# Altium PCB Sensor_Box_CAN_Switch.PCBDOC
Units mm, origin at the board's own origin, x right, y up, seen from the top; angles counter-clockwise.
Board outline 38 x 35.75 mm, 2 copper layers (Top, Bot), stack 1.571 mm thick; 63 components, 52 nets, 225 pads, 76 vias.
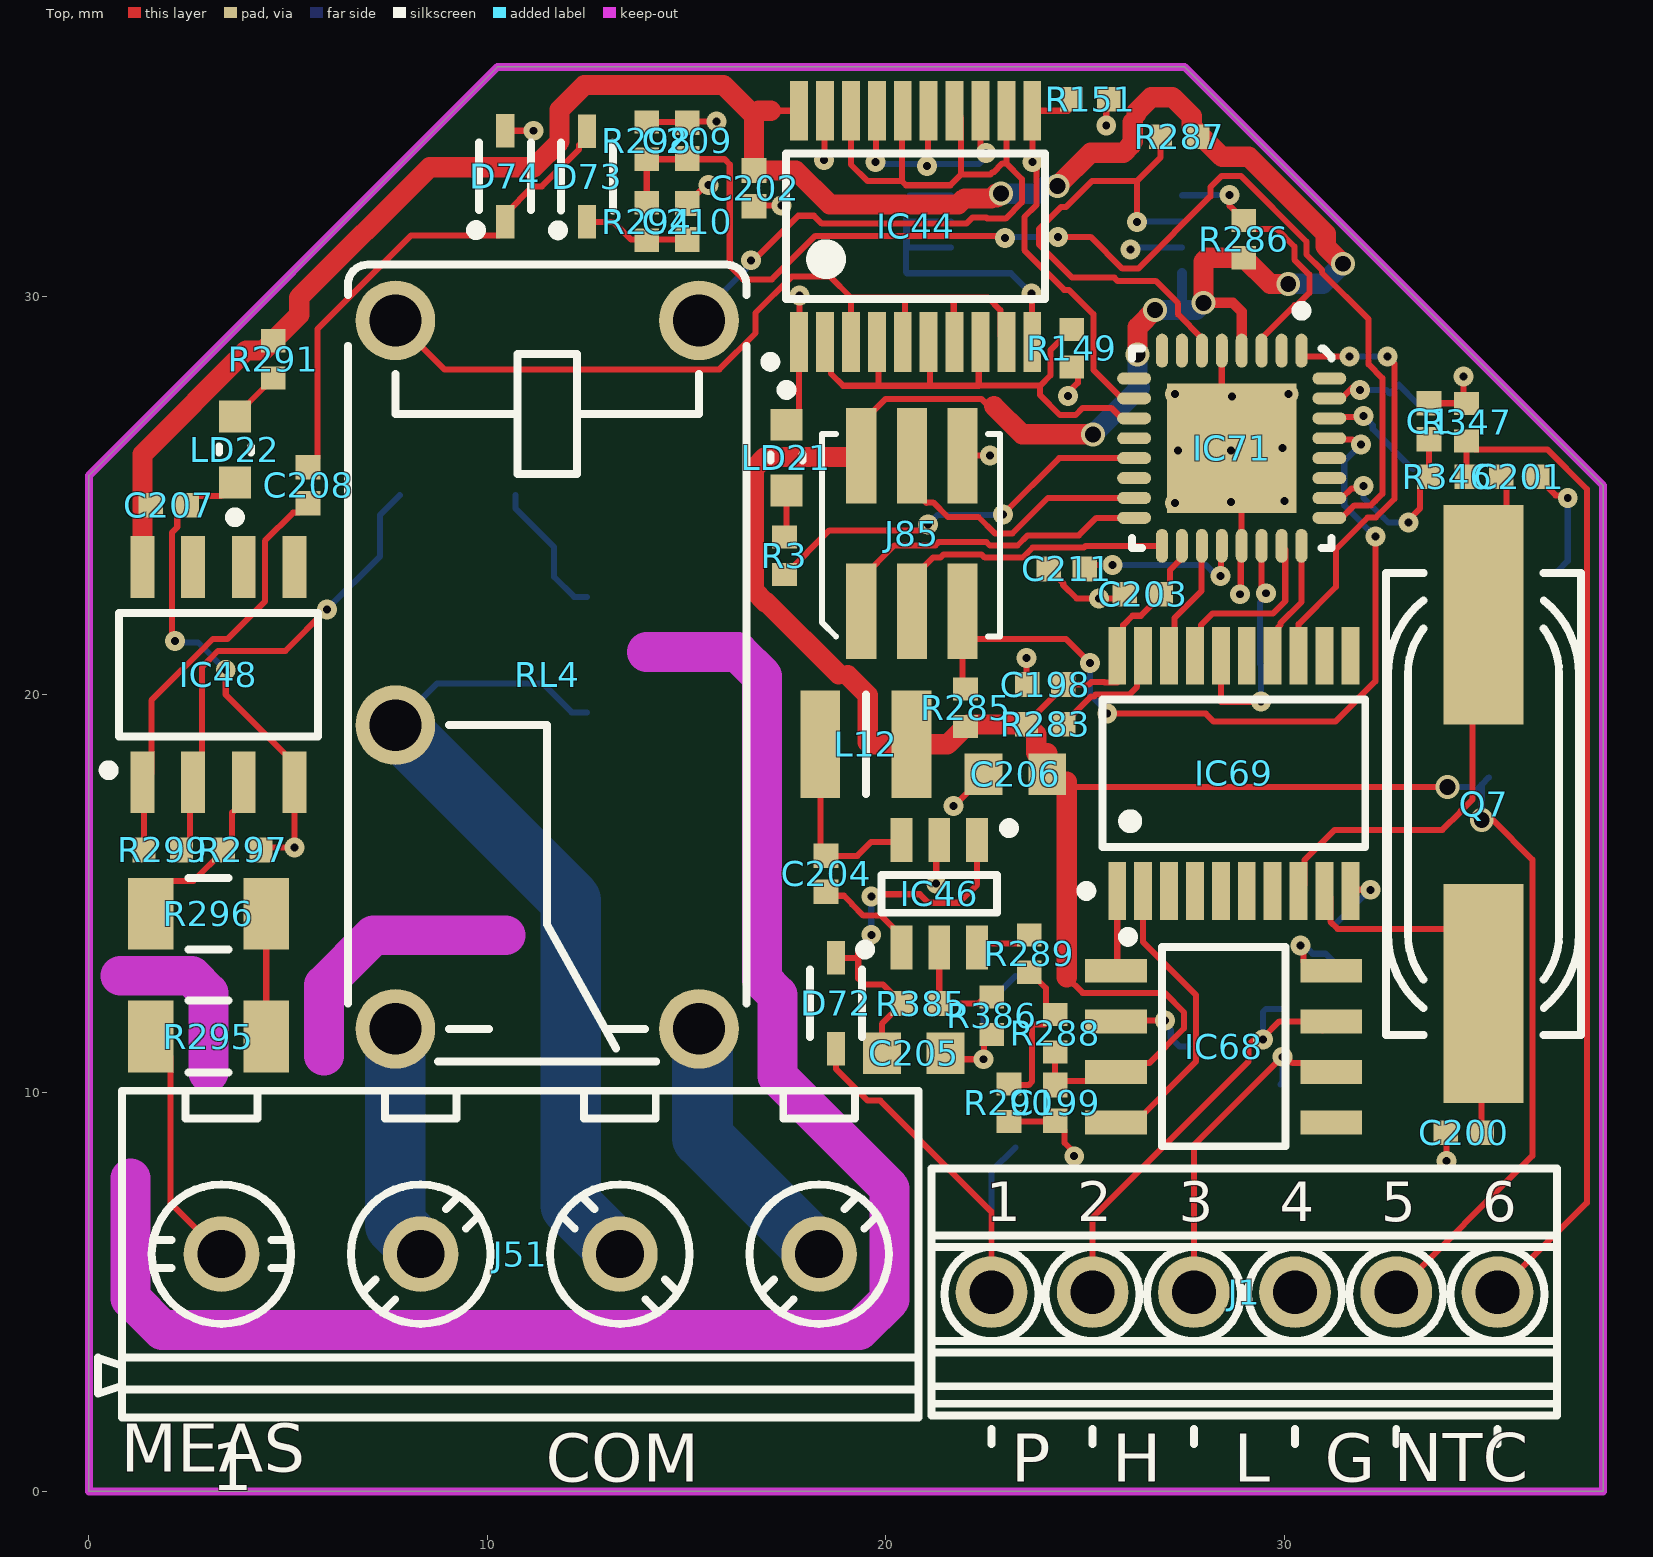
[diagram p0: Top view]
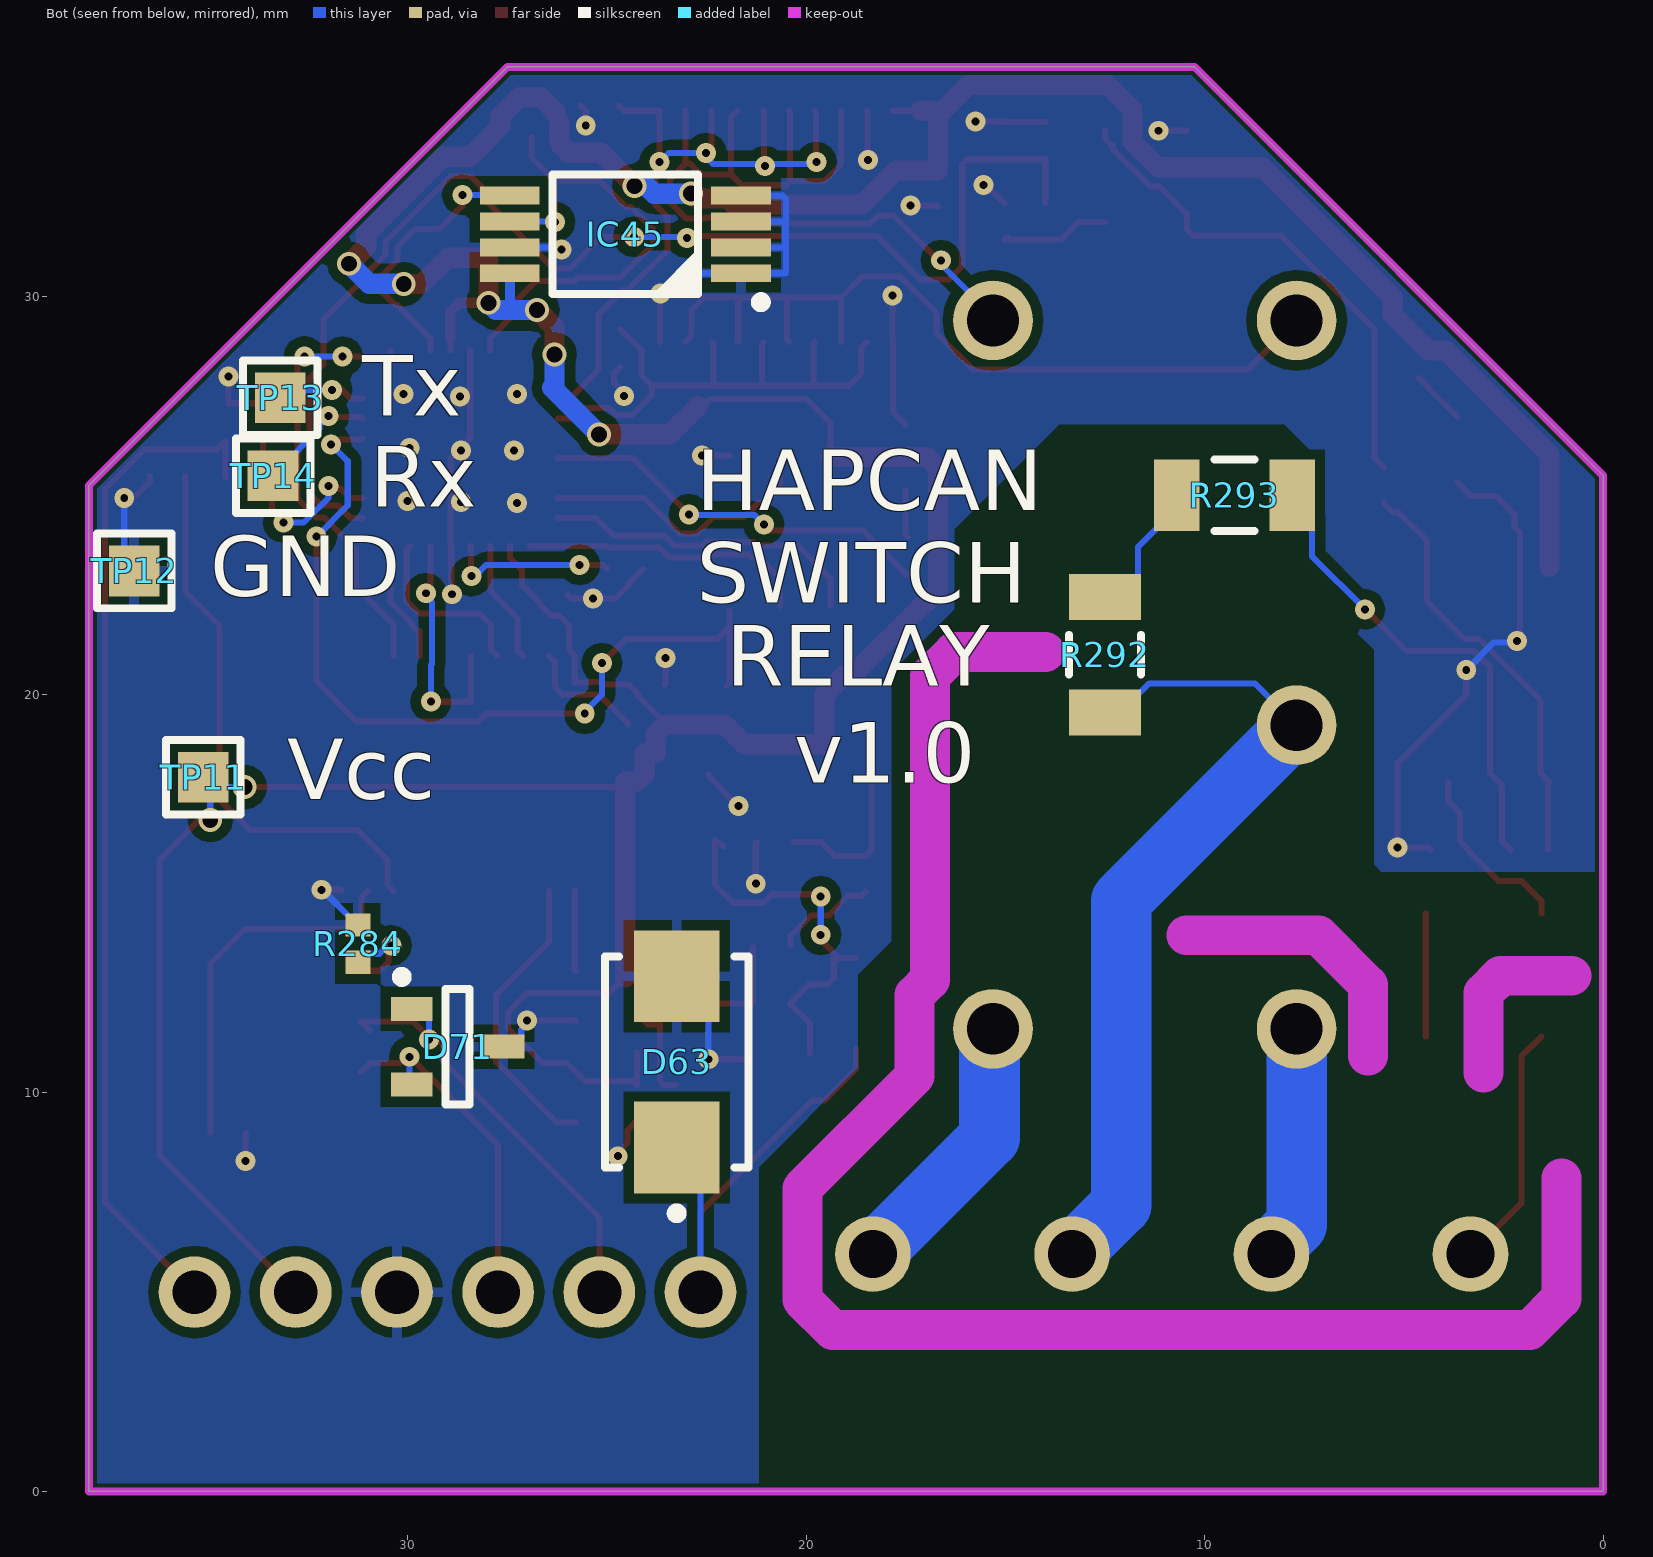
[diagram p1: Bot view, seen from below]
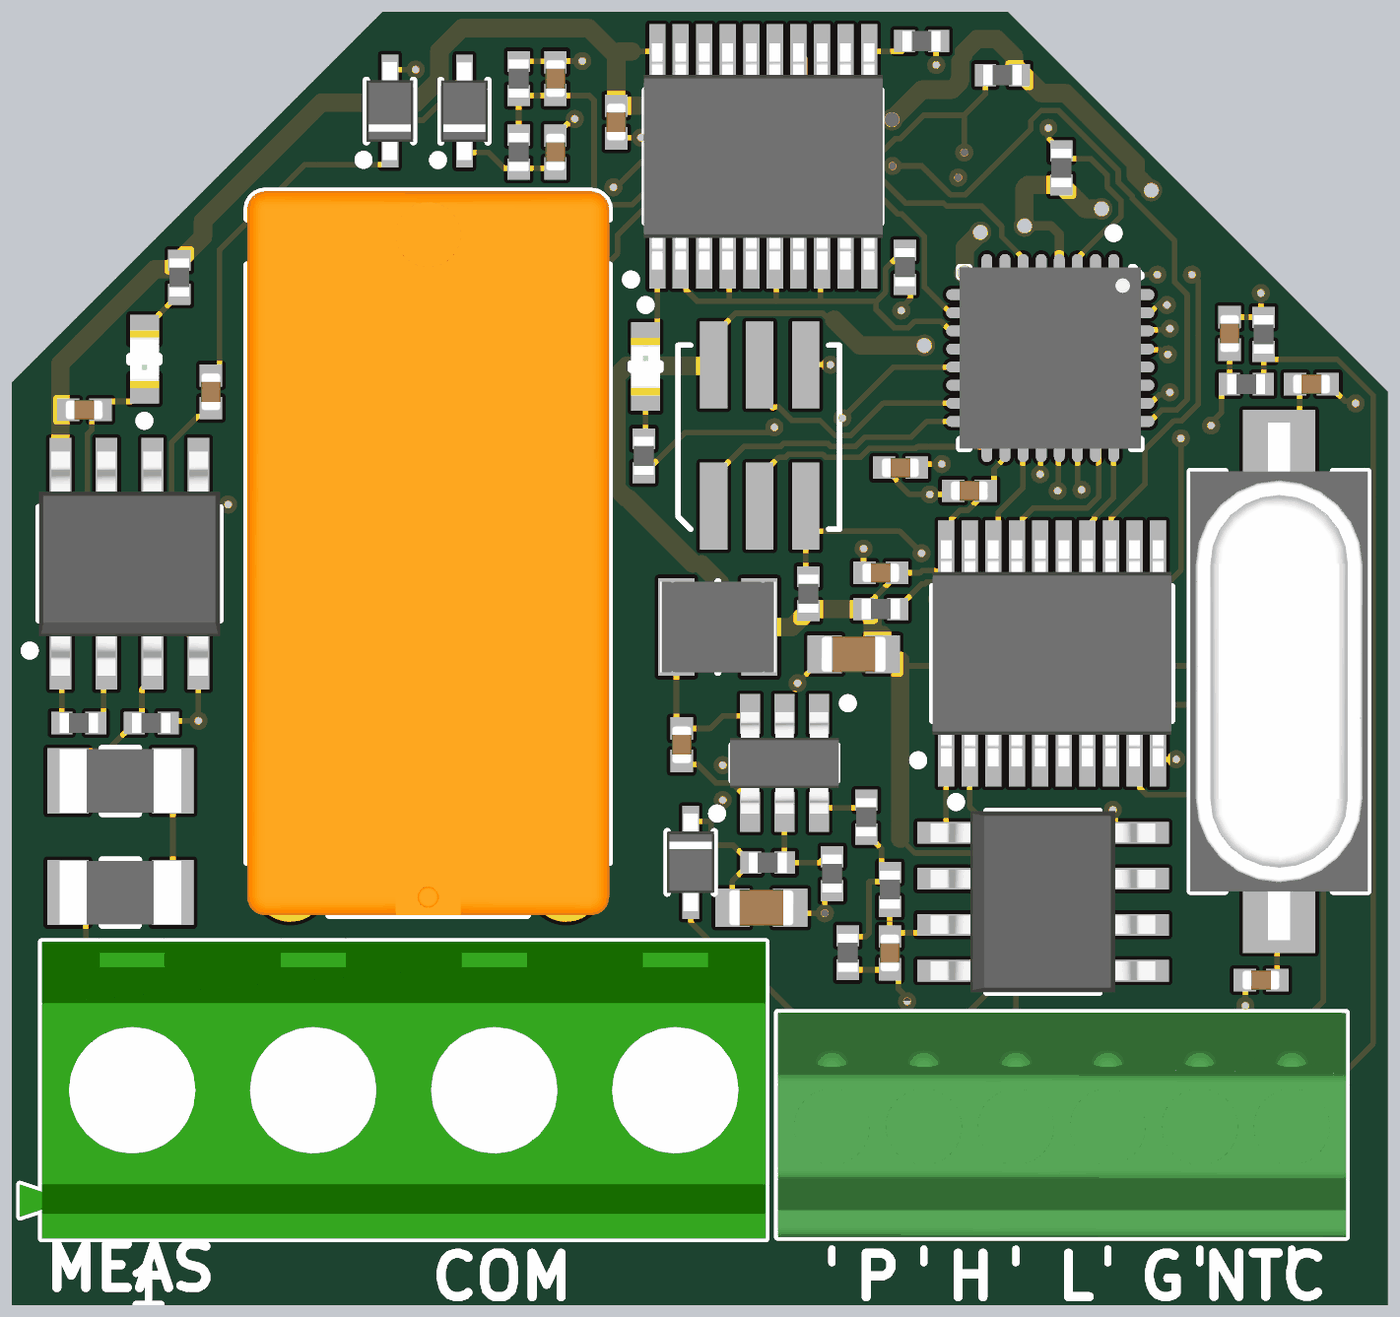
[diagram p2: 3D render of the assembled board from above, using the file's embedded part models]
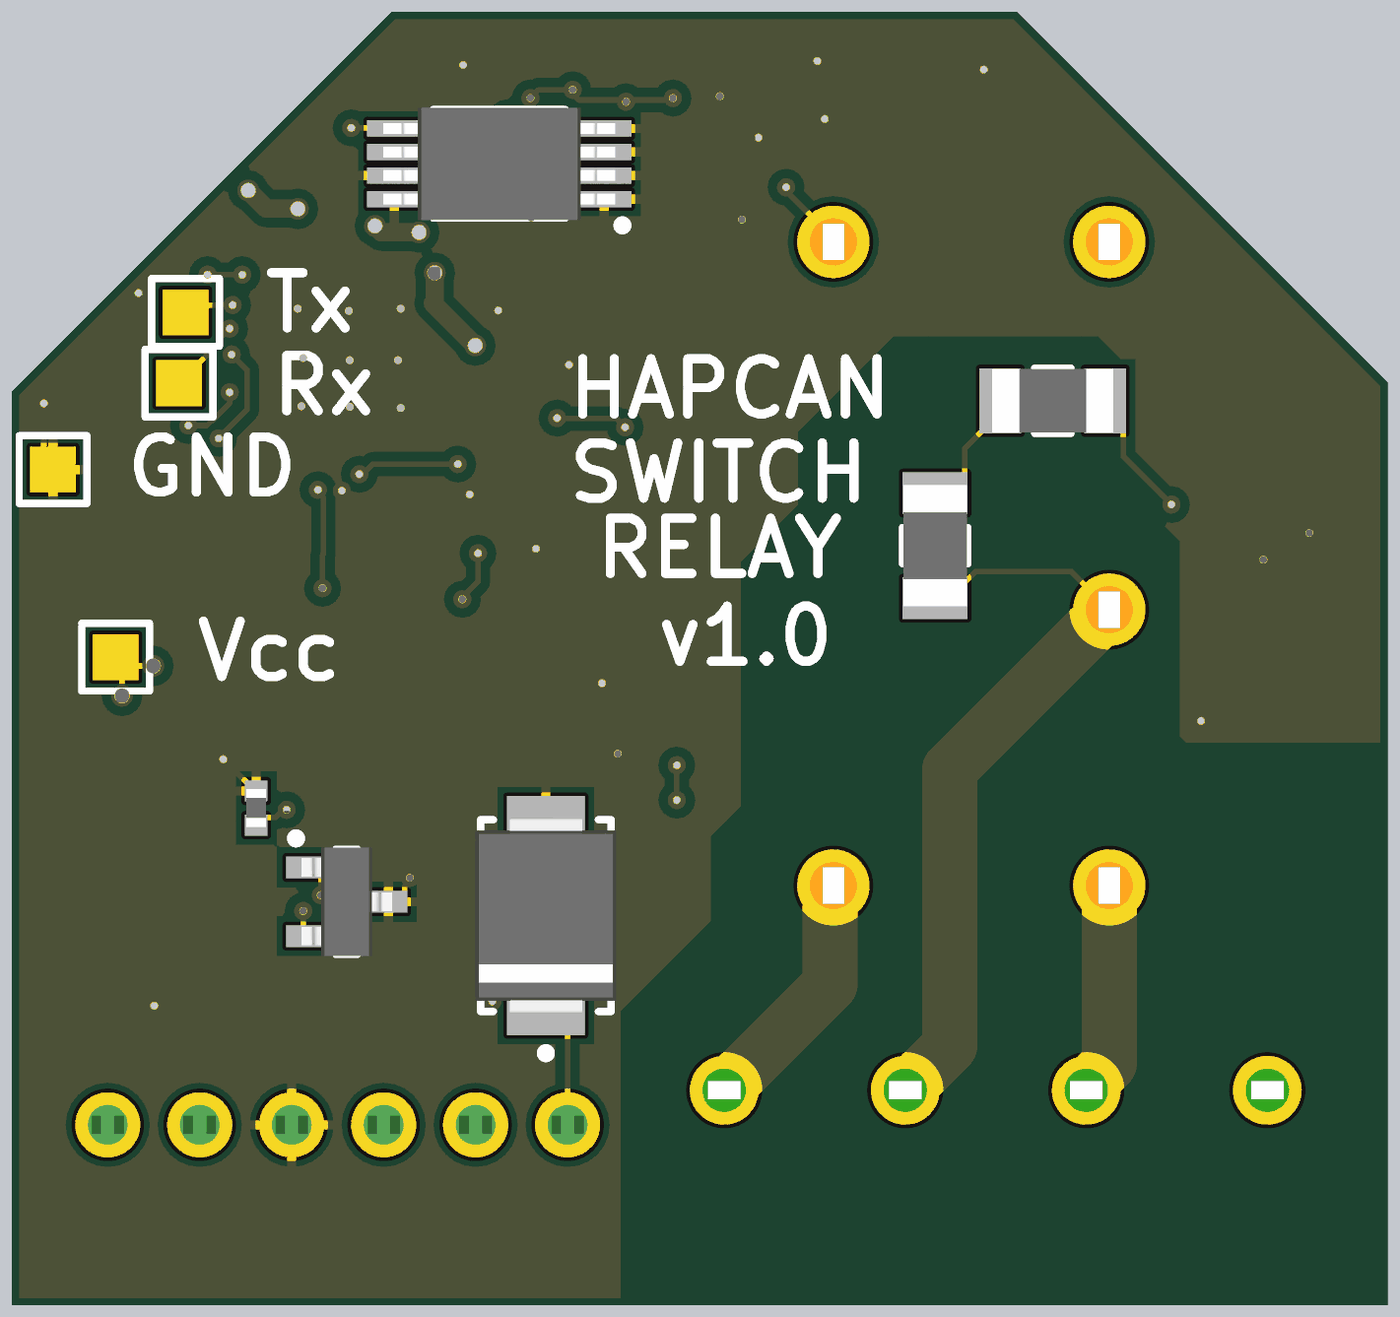
[diagram p3: 3D render of the assembled board from below, using the file's embedded part models]

## Layer stack, top to bottom
TopSolder: solder mask 0.0102, Solder Resist, Dk 3.5
Top: signal copper 0.0356
Dielectric1: core 1.5, FR-4, Dk 4.8
Bot: signal copper 0.0356
BottomSolder: solder mask 0.0102, Solder Resist, Dk 3.5

## Board outline
0,0 0,25.5 0.5,26 10.25,35.75 27.5,35.75 38,25.25 38,0

## Design rules (kind name [scope] priority, off if disabled: settings)
AcuteAngle [All] p1: minimum=6.00000000000000E+0001 checktracksonly=FALSE
Clearance keepout [All vs OnLayer('KeepOutLayer')] p1: gap=0.1 ignorepadtopadclearanceinfootprint=FALSE
Clearance [All] p2: gap=0.152 ignorepadtopadclearanceinfootprint=FALSE except(0.254: Arc-Poly Track-Poly SMDPad-Poly THPad-Poly Via-Poly Fill-Poly Poly-Poly)
DiffPairsRouting [All] p1: maxlimit=0.508 minlimit=0.381 mostfreqgap=0.432 toplayer_minwidth=0.381 toplayer_maxwidth=0.381 toplayer_prefwidth=0.381 bottomlayer_minwidth=0.381 bottomlayer_maxwidth=0.381 bottomlayer_prefwidth=0.381 maxuncoupledlength=12.7
HoleSize [All] p1: absolutevalues=TRUE maxlimit=5.08 minlimit=0.025 maxpercent=80.000 minpercent=20.000
MinimumSolderMaskSliver [All] p1: minsoldermaskwidth=0
MinimumSolderMaskSliver SilkscreenOverComponentPads [All] p2: minsoldermaskwidth=0
PlaneClearance [All] p1: clearance=0.203
PlaneConnect PlaneConnect_pad [(InPadClass('All Pads'))] p1: planeconnectstyle=Relief reliefexpansion=0.508 reliefentries=4 reliefconductorwidth=0.254 reliefairgap=0.254
PlaneConnect [All] p2: planeconnectstyle=Direct reliefexpansion=0.508 reliefentries=4 reliefconductorwidth=0.254 reliefairgap=0.254
PolygonConnect PolygonConnect_pad [(InPadClass('All Pads'))] p1: connectstyle=Relief reliefconductorwidth=0.254 reliefentries=4 polygonreliefangle="90 Angle" airgapwidth=0.254
PolygonConnect [All] p2: connectstyle=Direct reliefconductorwidth=0.254 reliefentries=4 polygonreliefangle="90 Angle" airgapwidth=0.254
RoomDefinition Sensor_Box_CAN_Switch [InComponentClass('Sensor_Box_CAN_Switch')] p1 off: confinementstyle=ConfineIn formatcopy=TRUE lockcomponents=FALSE outline 34.15,-51.85 216.899,-51.85 216.899,-28.1 34.15,-28.1
RoutingVias [All] p1: holewidth=0.2 width=0.5 viastyle="Through Hole" minholewidth=0.2 minwidth=0.5 maxholewidth=0.5 maxwidth=1
SilkToSilkClearance [All] p1: silktosilkclearance=0
SilkToSolderMaskClearance [IsPad] p1: minsilkscreentomaskgap=0 clearancetoexposedcopper=TRUE
SolderMaskExpansion [All] p1: expansion=0.102
ViasUnderSMD ViasUnderSMD_allow [InComponent('IC18') or InComponent('IC10') or InComponent('IC13') or InComponent('IC14') or InComponent('IC15')] p1: allowed=TRUE
ViasUnderSMD [All] p2: allowed=FALSE
Width Width_1 [(InDifferentialPairClass('All Differential Pairs'))] p1: maxlimit=0.203 minlimit=0.203 preferedwidth=0.203
Width [All] p2: maxlimit=2.54 minlimit=0.152 preferedwidth=0.152
23 further rules are at their usual default settings.

## Components (designator, comment, footprint, x,y, rotation, side; value= is the part's Value field where it differs from the comment)
C1 "100nF" CAPC1005X55N 33.634,26.859 r270 top
C198 "100nF" CAPC1005X55N 24,20.25 r0 top
C199 "100nF" CAPC1005X55N 24.25,9.75 r90 top
C200 "18pF" CAPC1005X55N 34.5,9 r0 top
C201 "18pF" CAPC1005X55N 35.895,25.462 r180 top
C202 "1uF" CAPC1005X55N 16.692,32.701 r270 top
C203 "100nF" CAPC1005X55N 26.446,22.516 r0 top
C204 "1uF" CAPC1005X55N 18.5,15.5 r90 top
C205 "22uF" CAPC1709X100N 20.701,10.998 r180 top
C206 "22uF" CAPC1709X100N 23.25,18 r0 top
C207 "1uF" CAPC1005X55N 2,24.75 r180 top
C208 "1uF" CAPC1005X55N 5.5,25.25 r90 top
C209 "1uF" CAPC1005X55N 15.016,33.903 r90 top
C210 "1uF" CAPC1005X55N 15.016,31.871 r90 top
C211 "1uF" CAPC1005X55N 24.541,23.151 r180 top
D63 "SMBJ15A" DIOM5336X265N 23.25,10.78 r90 bottom
D71 "PESD1CAN-UX" SOT95P237X112-3N 28.75,11.162 r180 bottom
D72 "1N4148WS" SODFL2512X100N 18.75,12.25 r270 top
D73 "1N4148WS" SODFL2512X100N 12.5,33 r90 top
D74 "1N4148WS" SODFL2512X100N 10.444,33.006 r90 top
IC44 "SN74HCT244PW" SOP65P640X120-20N 20.75,31.75 r90 top
IC45 "M24256-BRDW6" SOP65P640X120-8N 24.536,31.547 r0 bottom
IC46 "AP65111AWU-7" SOT95P280X100-6N 21.341,14.997 r270 top
IC48 "LM358AD" SOIC127P600X175-8N 3.25,20.5 r90 top
IC68 "MCP2551-I/SN" SOIC127P600X175-8N 28.478,11.162 r0 top
IC69 "MCP2515-I/ST" SOP65P640X110-20N 28.732,18.02 r90 top
IC71 "ATMEGA328PB-MU" QFN50P500X500X100-33N-S325 28.681,26.181 r270 top
J1 "=Family" PHOENIX_1725698 29,5 r0 top
J51 "=Family" TYCO_282836-4 10.825,5.955 r0 top
J85 "ZL322-2X3P or PLHTD6S-TR-CV" ZL322-2X3P 20.655,24.04 r0 top
L12 "6.8uH" IND_WALSIN_WLPN3030 19.5,18.75 r0 top
LD21 "Green" LED_KINGBRIGHT_KPH-1608CGCK 17.505,25.945 r270 top
LD22 "Green" LED_KINGBRIGHT_KPH-1608CGCK 3.662,26.148 r90 top
Q7 "20MHz" XTAL1160X490X430 35,17.25 r90 top
R3 "10k" RESC1005X40N 17.454,23.481 r90 top
R149 "10k" RESC1005X40N 24.668,28.688 r90 top
R151 "10k" RESC1005X40N 25.125,34.936 r180 top
R283 "10k" RESC1005X40N 24,19.25 r0 top
R284 "4k7" RESC1005X40N 31.25,13.75 r270 bottom
R285 "10k" RESC1005X40N 22.001,19.671 r90 top
R286 "1k" RESC1005X40N 28.986,31.431 r270 top
R287 "1k" RESC1005X40N 27.36,33.997 r0 top
R288 "68k" RESC1005X40N 24.25,11.5 r270 top
R289 "68k" RESC1005X40N 23.601,13.499 r270 top
R290 "13k" RESC1005X40N 23.089,9.754 r90 top
R291 "10k" RESC1005X40N 4.627,28.409 r270 top
R292 "1M" RESC3216X65N 12.5,21 r90 bottom
R293 "1M" RESC3216X65N 9.25,25 r180 bottom
R294 "10k" RESC1005X40N 14,31.871 r90 top
R295 "1M" RESC3216X65N 3,11.416 r0 top
R296 "1M" RESC3216X65N 3,14.5 r180 top
R297 "10k" RESC1005X40N 3.85,16.1 r0 top
R298 "10k" RESC1005X40N 14,33.903 r270 top
R299 "10k" RESC1005X40N 1.85,16.1 r0 top
R346 "10k" RESC1005X40N 34.091,25.462 r180 top
R347 "10k" RESC1005X40N 34.574,26.834 r270 top
R385 "13k" RESC1005X40N 20.879,12.243 r180 top
R386 "13k" RESC1005X40N 22.657,11.938 r90 top
RL4 "REL_TYCO_PE01" REL_TYCO_PE01 11.5,20.5 r270 top value=5VDC
TP11 "Test Point" TPS127 35.133,17.918 r270 bottom
TP12 "Test Point" TPS127 36.86,23.1 r270 bottom
TP13 "Test Point" TPS127 33.202,27.443 r270 bottom
TP14 "Test Point" TPS127 33.38,25.488 r270 bottom

## Footprints (in the part's own frame and the unit in brackets; to place one, negate y for a bottom-side part, rotate by r counter-clockwise, add the part's x,y. Pads: shape width x height; smd on the part's side, far side on the other; paste and mask are expansions set on the pad)
CAPC1005X55N [mm] "Chip Capacitor, Body 1.0x0.55mm, IPC Medium Density"
  rect 0.62x0.62 smd: 1(-0.45,0) 2(0.45,0)
  body extent -0.52,-0.27 0.53,0.28, height 0.55
CAPC1709X100N [mm] "Capacitor,non-Polarized, Chip;1.65mm L X 0.85mm W X 1.00mm H, IPC Medium Density"
  rect 0.95x1.05 smd: 1(-0.8,0) 2(0.8,0)
  body extent -0.9,-0.5 0.9,0.5, height 1
DIOM5336X265N [mm] "DO-214-AA/SMB Diode, Molded Body; 5.34mm L X 3.625mm W X 2.65mm H, IPC Medium Density"
  rect 2.3x2.15 smd: 1(-2.15,0) 2(2.15,0)
  silkscreen extent -3.92,-1.8 2.65,1.8, body extent -2.7,-1.95 2.7,1.95, height 2.4
IND_WALSIN_WLPN3030 [mm] "Miniature Surface Mount Power Inductors, 3mm L X 3mm W X 1.5mm H"
  rect 1x2.7 smd: 1(-1.145,0) 2(1.145,0)
  silkscreen extent 0,-1.25 0,1.25, body extent -1.6,-1.25 1.6,1.25, height 2.3
LED_KINGBRIGHT_KPH-1608CGCK [mm] "SMT Green LED, Case 0603, Body L 1.6 x W 0.8mm H 0.65mm"
  rect 0.8x0.8 smd: 1(-0.825,0) 2(0.825,0)
  silkscreen extent -1.82,-0.4 0.08,0.4, body extent -0.8,-0.4 0.8,0.4, height 0.65
PHOENIX_1725698 [mm] "Micro PCB Terminal Block, Pitch 2.54mm, 6 Positions, Screw Connection"
  round 1.8 hole 1.1: 1(-6.35,0) 2(-3.81,0) 3(-1.27,0) 4(1.27,0) 5(3.81,0) 6(6.35,0)
  silkscreen extent -7.85,-3.81 7.85,3.1, body extent -7.85,-3.1 7.85,3.1, height 8.5
QFN50P500X500X100-33N-S325 [mm] "QFN, (MO-220-VHHD-4) 0.50mm pitch,square; 8 pin X 8 pin, 5mm X 5mm X 1.00mm H body (w/thermal tab 3.25 X 3.25mm),  IPC Medium Density"
  oval 0.85x0.3 smd: 1(-2.45,1.75) 2(-2.45,1.25) 3(-2.45,0.75) 4(-2.45,0.25) 5(-2.45,-0.25) 6(-2.45,-0.75) 7(-2.45,-1.25) 8(-2.45,-1.75) 17(2.45,-1.75) 18(2.45,-1.25) 19(2.45,-0.75) 20(2.45,-0.25) 21(2.45,0.25) 22(2.45,0.75) 23(2.45,1.25) 24(2.45,1.75)
  oval 0.3x0.85 smd: 9(-1.75,-2.45) 10(-1.25,-2.45) 11(-0.75,-2.45) 12(-0.25,-2.45) 13(0.25,-2.45) 14(0.75,-2.45) 15(1.25,-2.45) 16(1.75,-2.45) 25(1.75,2.45) 26(1.25,2.45) 27(0.75,2.45) 28(0.25,2.45) 29(-0.25,2.45) 30(-0.75,2.45) 31(-1.25,2.45) 32(-1.75,2.45)
  rect 3.25x3.25 smd: 33(0,0)
  silkscreen extent -3.57,-2.5 2.5,2.5, body extent -2.5,-2.5 2.5,2.5, height 1
REL_TYCO_PE01 [mm] "1 form C (CO) General Purpose Low Power PCB Relay, PE Series, Body 20mm x 10mm"
  round 2 hole 1.3: 11(1.27,-3.81) 12(8.89,3.81) 14(8.89,-3.81) A1(-8.89,-3.81) A2(-8.89,3.81)
  silkscreen extent -10.29,-5 9.71,5, body extent -10.29,-5 9.71,5, height 10
RESC1005X40N [mm] "Chip Resistor, EIA 0402, Metric 1005, Body 1.0x0.5mm, IPC Medium Density"
  rect 0.58x0.62 smd: 1(-0.47,0) 2(0.47,0)
  body extent -0.52,-0.27 0.53,0.28, height 0.4
RESC3216X65N [mm] "Chip Resistor, EIA 1206, Metric 3216, Body 3.2x1.6mm, IPC Medium Density"
  rect 1.15x1.8 smd: 1(-1.45,0) 2(1.45,0)
  silkscreen extent -0.5,-0.9 0.5,0.9, body extent -1.67,-0.87 1.68,0.88, height 0.65
SODFL2512X100N [mm] "SODFL Diode; 1.70mm W X 1.25mm L X 1.00mm H body, IPC Medium Density"
  rect 0.84x0.46 smd: 1(-1.14,0) 2(1.14,0)
  silkscreen extent -1.47,-0.65 0.85,0.86, body extent -1.35,-0.65 1.35,0.65, height 1
SOIC127P600X175-8N [mm] "SOIC 8, Pitch 1.27mm - Body 4x5mm, IPC Medium Density"
  rect 1.55x0.6 smd: 1(-2.7,1.905) 2(-2.7,0.635) 3(-2.7,-0.635) 4(-2.7,-1.905) 5(2.7,-1.905) 6(2.7,-0.635) 7(2.7,0.635) 8(2.7,1.905)
  silkscreen extent -2.52,-2.5 1.55,2.88, body extent -3.1,-2.5 3.1,2.5, height 1.75
SOP65P640X110-20N [mm] "SOP, 20-Leads, Body 6.6x4.5mm (max), Pitch 0.65mm, IPC Medium Density"
  rect 1.45x0.45 smd: 1(-2.95,2.925) 2(-2.95,2.275) 3(-2.95,1.625) 4(-2.95,0.975) 5(-2.95,0.325) 6(-2.95,-0.325) 7(-2.95,-0.975) 8(-2.95,-1.625) 9(-2.95,-2.275) 10(-2.95,-2.925) 11(2.95,-2.925) 12(2.95,-2.275) 13(2.95,-1.625) 14(2.95,-0.975) 15(2.95,-0.325) 16(2.95,0.325) 17(2.95,0.975) 18(2.95,1.625) 19(2.95,2.275) 20(2.95,2.925)
  silkscreen extent -3.07,-3.3 1.85,3.82, body extent -3.12,-3.3 3.12,3.3, height 1.19
SOP65P640X120-8N [mm] "SOP, 0.65mm pitch; 8 pin, 4.40mm W X 3.00mm L X 1.20mm H body, IPC Medium Density"
  rect 1.5x0.45 smd: 1(-2.9,0.975) 2(-2.9,0.325) 3(-2.9,-0.325) 4(-2.9,-0.975) 5(2.9,-0.975) 6(2.9,-0.325) 7(2.9,0.325) 8(2.9,0.975)
  silkscreen extent -3.52,-1.5 1.83,1.82, body extent -3.2,-1.55 3.2,1.55, height 1.2
SOP65P640X120-20N [mm] "SOP, 20-Leads, Body 6.5x4.4mm, Pitch 0.65mm, IPC Medium Density"
  rect 1.5x0.45 smd: 1(-2.9,2.925) 2(-2.9,2.275) 3(-2.9,1.625) 4(-2.9,0.975) 5(-2.9,0.325) 6(-2.9,-0.325) 7(-2.9,-0.975) 8(-2.9,-1.625) 9(-2.9,-2.275) 10(-2.9,-2.925) 11(2.9,-2.925) 12(2.9,-2.275) 13(2.9,-1.625) 14(2.9,-0.975) 15(2.9,-0.325) 16(2.9,0.325) 17(2.9,0.975) 18(2.9,1.625) 19(2.9,2.275) 20(2.9,2.925)
  silkscreen extent -3.52,-3.25 1.82,3.77, body extent -3.12,-3.3 3.12,3.3, height 1.2
SOT95P237X112-3N [mm] "SOT, 0.95mm, pitch; 3 pin,1.30mm W X 2.92mm L X 1.12mm H body, IPC Medium Density"
  rect 1.05x0.6 smd: 1(-1.15,0.95) 2(-1.15,-0.95) 3(1.15,0)
  silkscreen extent -1.53,-1.45 0.3,1.87, body extent -1.25,-1.5 1.25,1.5, height 1.1
SOT95P280X100-6N [mm] "SOT23, 0.95mm pitch; 6 pin, 1.625mm W X 2.90mm L X 1.00mm H body, IPC Medium Density"
  rect 1.1x0.55 smd: 1(-1.35,0.95) 2(-1.35,0) 3(-1.35,-0.95) 4(1.35,-0.95) 5(1.35,0) 6(1.35,0.95)
  silkscreen extent -1.77,-1.45 0.48,1.88, body extent -1.4,-1.5 1.4,1.5, height 1
TPS127 [mm] "1.27 x  1.27mm SMD Test Point Area"
  rect 1.27x1.27 smd paste-1.27: 1(0,0)
  silkscreen extent -0.94,-0.94 0.94,0.93
TYCO_282836-4 [mm] "15.5A, 300V, Terminal Block, Pitch 5mm, 4 Positions, Screw Connection"
  round 1.9 hole 1.2: 1(-7.5,0) 2(-2.5,0) 3(2.5,0) 4(7.5,0)
  silkscreen extent -10.6,-4.1 10,4.1, body extent -10.6,-4.1 10,4.1, height 10
XTAL1160X490X430 [mm] "HC49/4H SMX Case, SMD Cristal, Body 11.6x4.9mm"
  rect 5.5x2 smd: 1(-4.75,0) 2(4.75,0)
  silkscreen extent -5.8,-2.45 5.8,2.45, body extent -7.15,-2.45 7.15,2.45, height 4.3
ZL322-2X3P [mm] "SMT 1.27 mm dual goldpin"
  rect 0.76x2.4 smd: 1(-1.27,-1.95) 2(-1.27,1.95) 3(0,-1.95) 4(0,1.95) 5(1.27,-1.95) 6(1.27,1.95)
  silkscreen extent -2.25,-2.59 2.21,2.49, body extent -2.05,-2.15 2.03,2.15, height 4.5

## Part data
C1 C198 C199 C203: library part CC0402_100NF_16V_10%_X5R, "Non-polarised capacitor", Case=0402, Manufacturer=GENERIC, Manufacturer1 ComponentHeight=0.55mm, Manufacturer1 Example=MURATA, Manufacturer1 Part Number=GRM155R61C104KA88D, Tolerance=±10%, Voltage=16V, Author="CERN DEM JLC", Component Type=Standard, CreateDate=10.12.2013, HelpURL=\\cern.ch\dfs\Applications\Altium\Datasheets\CC0402_X5R_MURATA_GRM.pdf, LatestRevisionDate=10.12.2013, Manufacturer Part Number=CC0402_100NF_16V_10%_X5R, Mounted=Yes, Part Description="SMD Multilayer Chip Ceramic Capacitor", Part Number=CC0402_100NF_16V_10%_X5R, Pin Count=2, Sense=No, SMD=Yes, Socket=No, Status=None, TC=X5R
C200 C201: library part CC0402_18PF_50V_5%_C0G, "Non-polarised capacitor", Case=0402, Manufacturer=GENERIC, Manufacturer1 ComponentHeight=0.55mm, Manufacturer1 Example=KEMET, Manufacturer1 Part Number=C0402C180J5GACTU, Tolerance=±5%, Voltage=50V, Author="CERN DEM JLC", Component Type=Standard, CreateDate=04.10.2016, HelpURL="\\cern.ch\dfs\Applications\Altium\Datasheets\CC0805_C0G_KEMET_(Commercial Grade).pdf", LatestRevisionDate=04.10.2016, Manufacturer Part Number=CC0402_18PF_50V_5%_C0G, Mounted=Yes, Part Description="SMD Multilayer Chip Ceramic Capacitor", Part Number=CC0402_18PF_50V_5%_C0G, Pin Count=2, Sense=No, SMD=Yes, Socket=No, Status=Preferred, TC=C0G/NP0
C202 C204 C207 C208 C209 C210 C211: library part CC0402_1UF_16V_10%_X5R, "Non-polarised capacitor", Case=0402, Manufacturer=GENERIC, Manufacturer1 ComponentHeight=0.55mm, Manufacturer1 Example=TDK, Manufacturer1 Part Number=C1005X5R1C105KT, Tolerance=±10%, Voltage=16V, Author="CERN DEM JLC", Component Type=Standard, CreateDate=25.10.2012, HelpURL=\\cern.ch\dfs\Applications\Altium\Datasheets\CC0402_X5R_TDK_C.pdf, LatestRevisionDate=25.10.2012, Manufacturer Part Number=CC0402_1UF_16V_10%_X5R, Mounted=Yes, Part Description="SMD Multilayer Chip Ceramic Capacitor", Part Number=CC0402_1UF_16V_10%_X5R, Pin Count=2, Sense=No, SMD=Yes, Socket=No, Status=Preferred, TC=X5R
C205 C206: library part CC0603_22UF_6.3V_20%_X5R, "Non-polarised capacitor", Case=0603, Manufacturer=GENERIC, Manufacturer1 ComponentHeight=1mm, Manufacturer1 Example=TDK, Manufacturer1 Part Number=C1608X5R0J226M080AC, Tolerance=±20%, Voltage=6.3V, Author="CERN DEM JLC", Component Type=Standard, CreateDate=16.12.2013, HelpURL=\\cern.ch\dfs\Applications\Altium\Datasheets\CC0603_X5R_TDK_C.pdf, LatestRevisionDate=13.09.2016, Manufacturer Part Number=CC0603_22UF_6.3V_20%_X5R, Mounted=Yes, Part Description="SMD Multilayer Chip Ceramic Capacitor", Part Number=CC0603_22UF_6.3V_20%_X5R, Pin Count=2, Sense=No, SMD=Yes, Socket=No, Status=None, TC=X5R
D63: "Zener Diode", Case=DO-214AA, Manufacturer="FAIRCHILD SEMICONDUCTOR", Power=600W, Voltage=15V, Author="CERN DEM JLC", Bonding=No, ComponentHeight=2.65mm, Component Type=Standard, CreateDate=08.12.2008, Device=SMBJ15A, HelpURL=\\cern.ch\dfs\Applications\Altium\Datasheets\SMBJ.pdf, LatestRevisionDate=19.12.2011, Manufacturer Part Number=SMBJ15A, Mounted=Yes, PackageDescription="DO-214-AA/SMB Diode, Molded Body; 5.34mm L X 3.625mm W X 2.65mm H, IPC Medium Density", Part Description="Uni-Directional Transient Voltage Suppressor Diode", Part Number=SMBJ15A, Pin Count=2, PressFit=No, Sense=No, SMD=Yes, Socket=No
D71: "TVS Diode for CAN", Case=SOT-23, Manufacturer=Nexperia, Power=400W, Voltage=24V, Author="CERN DEM JLC", Bonding=No, ComponentHeight=1.12mm, Component Type=Standard, CreateDate=03.09.2014, Device=PESD1CAN-UX, HelpURL=\\cern.ch\dfs\Applications\Altium\Datasheets\SM712.TCT.pdf, LatestRevisionDate=13.01.2015, Manufacturer Part Number=PESD1CAN-UX, Mounted=Yes, PackageDescription="SOT, 0.95mm, pitch; 3 pin,1.30mm W X 2.92mm L X 1.12mm H body, IPC Medium Density", Part Description="TVS Diode for CAN", Part Number=PESD1CAN-UX, Pin Count=3, PressFit=No, Sense=No, SMD=Yes, Socket=No
D72 D73 D74: "Diode", Case=SOD-323F, Manufacturer="FAIRCHILD SEMICONDUCTOR", Power=150mA, Voltage=75V, Author="CERN DEM JLC", Bonding=No, ComponentHeight=1mm, Component Type=Standard, CreateDate=12.05.2011, Device=1N4148WS, HelpURL=\\cern.ch\dfs\Applications\Altium\Datasheets\1N4148WS.pdf, LatestRevisionDate=12.05.2011, Manufacturer Part Number=1N4148WS, Mounted=Yes, PackageDescription="SODFL Diode; 1.70mm W X 1.25mm L X 1.00mm H body, IPC Medium Density", Part Description="Small Signal Diodes", Part Number=1N4148WS, Pin Count=2, PressFit=No, Sense=No, SMD=Yes, Socket=No
IC44: "Octal Buffer/Driver with 3-State Ouputs", Case=TSSOP20, Manufacturer="TEXAS INSTRUMENTS", Author="CERN DEM JLC", Bonding=No, ComponentHeight=1.2mm, Component Type=Standard, CreateDate=11.10.2011, Device=SN74HCT244PW, HelpURL=\\cern.ch\dfs\Applications\Altium\Datasheets\SN74HCT244PW.pdf, LatestRevisionDate=11.10.2011, Manufacturer Part Number=SN74HCT244PW, Mounted=Yes, PackageDescription="SOP, 20-Leads, Body 6.5x4.4mm, Pitch 0.65mm, IPC Medium Density", Part Description="Octal Buffer And Line Driver with 3-State Ouputs", Part Number=SN74HCT244PW, Pin Count=20, PressFit=No, Sense=No, SMD=Yes, Socket=No
IC45: "256-Kbit Serial I²C Bus EEPROM", Case=TSSOP8, Manufacturer="ST MICROELECTRONICS", Part Number=M24256-BRDW6P, Author="CERN DEM MR", Bonding=No, ComponentHeight=1.2mm, Component Type=Standard, CreateDate=17.03.2016, Device=M24256-BRDW6, HelpURL=\\cern.ch\dfs\Applications\Altium\Datasheets\M24256-BRDW6P.pdf, LatestRevisionDate=17.03.2016, Manufacturer Part Number=M24256-BRDW6, Mounted=Yes, PackageDescription="SOP, 0.65mm pitch; 8 pin, 4.40mm W X 3.00mm L X 1.20mm H body, IPC Medium Density", Part Description="256-Kbit Serial I²C Bus EEPROM", Pin Count=8, PressFit=No, Sense=No, SMD=Yes, Socket=No
IC46: "Light Load Improved 1.5A Synch DC/DC Buck Converter", Case=SOT23-6, Manufacturer="DIODES INCORPORATED", Author="CERN DEM JLC", Bonding=No, ComponentHeight=1.1mm, Component Type=Standard, CreateDate=20.03.2018, Device=AP65111AWU-7, HelpURL=\\cern.ch\dfs\Applications\Altium\Datasheets\AP65111AWU-7.pdf, LatestRevisionDate=20.03.2018, Manufacturer Part Number=AP65111AWU-7, Mounted=Yes, PackageDescription="SOT23, 0.95mm pitch; 6 pin, 1.625mm W X 2.90mm L X 1.00mm H body, IPC Medium Density", Part Description="Light Load Improved 1.5A Synch DC/DC Buck Converter", Part Number=AP65111AWU-7, Pin Count=6, PressFit=No, Sense=No, SMD=Yes, Socket=No
IC48: "Dual Operational Amplifier", Case=SOIC8, Manufacturer="TEXAS INSTRUMENTS", Author="CERN DEM JLC", Bonding=No, ComponentHeight=1.75mm, Component Type=Standard, CreateDate=02.12.2008, Device=LM358AD, HelpURL=\\cern.ch\dfs\Applications\Altium\Datasheets\LM358AD.pdf, LatestRevisionDate=13.04.2010, Manufacturer Part Number=LM358AD, Mounted=Yes, PackageDescription="SOIC 8, Pitch 1.27mm - Body 4x5mm, IPC Medium Density", Part Description="Dual Operational Amplifier", Part Number=LM358AD, Pin Count=8, PressFit=No, Sense=No, SMD=Yes, Socket=No
IC68: "High-Speed CAN Transceiver, 8-Pin SOIC, Industrial Temperature", Case=SOIC8, Manufacturer="MICROCHIP TECHNOLOGY", Author=GK, Bonding=No, ComponentHeight=1.75mm, Component Type=Standard, CreateDate=07.09.2016, Device=MCP2551-I/SN, LatestRevisionDate=07.09.2016, Manufacturer Part Number=MCP2551-I/SN, Mounted=Yes, PackageDescription="SOIC 8, Pitch 1.27mm - Body 4x5mm, IPC Medium Density", Part Description="High-Speed CAN Transceiver", Part Number=MCP2551-I/SN, Pin Count=8, PressFit=No, Sense=No, SMD=Yes, Socket=No
IC69: library part IFC_MCP2515_TSSOP, "CAN Controller With SPI nterface", Case=TSSOP20, Manufacturer=Microchip, Manufacturer Part Number=MCP2515T-I/ST, Component Type=Standard, Device=MCP2515, Mounted=Yes, PackageDescription="TSSOP 20, Pitch 0.65mm - Body 4.5x6.5mm, IPC Medium Density", Part Description="Stand-Alone CAN Controller with SPI Interface", Part Number=MCP2515T-I/ST, Pin Count=20, SMD=Yes
IC71: "8-bit AVR 20MHz Microcontroller With 32K Bytes In-System  Programmable  Flash", Case=QFN32, Manufacturer=ATMEL, Author=GK, Bonding=No, ComponentHeight=1mm, Component Type=Standard, CreateDate=2011-02-08, Device=ATMEGA328PB-MU, HelpURL=\\cern.ch\dfs\Applications\Altium\Datasheets\ATMEGA328P-MU.pdf, LatestRevisionDate=2014-07-02, Manufacturer Part Number=ATMEGA328PB-MU, Mounted=Yes, PackageDescription="QFN, (MO-220-VHHD-2) 0.50mm pitch,square; 8 pin X 8 pin, 5mm X 5mm X 1.00mm H body (w/thermal tab 3.25 X 3.25mm),  IPC Medium Density", Part Description="8-bit AVR Microcontroller, 32KB Flash, 1KB EEPROM, 2KB SRAM, 32-pin MLF, Industrial Grade (-40°C to 85°C)", Part Number=ATMEGA328PB-MU, Pin Count=33, PressFit=No, Sense=No, SMD=Yes, Socket=No
J1: library part PHOENIX_1725698, "Terminal Block, 6 Positions, Screw Connection", Manufacturer="PHOENIX CONTACT", Manufacturer Part Number="1725698 (MPT 0,5/6-2,54)", Author="CERN DEM JMW", ComponentHeight=8.5mm, Component Type=Standard, CreateDate=07.11.2008, HelpURL=\\cern.ch\dfs\Applications\Altium\Datasheets\PHOENIX_1725698.pdf, LatestRevisionDate=26.04.2010, Mounted=Yes, Part Description="6A, 63V, Terminal Block, Pitch 2.54mm, 6 Positions, Screw Connection", Part Number=PHOENIX_1725698, Pin Count=6, PressFit=No, Sense=No, SMD=No, Socket=No, Status=None
J51: library part TYCO_282836-4, "Terminal Block, 4 Positions, Screw Connection", Manufacturer="TYCO ELECTRONICS", Manufacturer Part Number=282836-4, Author="CERN DEM JLC", ComponentHeight=10mm, Component Type=Standard, CreateDate=10.11.2014, HelpURL=\\cern.ch\dfs\Applications\Altium\Datasheets\TYCO_282836-4.pdf, LatestRevisionDate=10.11.2014, Mounted=Yes, Part Description="15.5A, 300V, Terminal Block, Pitch 5mm, 4 Positions, Screw Connection", Part Number=TYCO_282836-4, Pin Count=4, PressFit=No, Sense=No, SMD=No, Socket=No, Status=None
J85: library part "CON_2x3 1.27 SMT Male", "1.27 mm dual row goldpin (Maritex)"
L12: "6,8uH; 900mA; 0,211O; 3x3x1,5mm", Manufacturer=WALSIN, Manufacturer Part Number=WLPN303015M6R8PB, Part Number=IND_6.8UH_20%_WALSIN_WLPN303015M6R8PB, Power=900mA, Resistance=0.21R, Tolerance=±20%, Author=GK, ComponentHeight=1.5, Component Type=Standard, CreateDate=11.07.2016, HelpURL=\\cern.ch\dfs\Applications\Altium\Datasheets\IND_MURATA-PS_8200.pdf, LatestRevisionDate=11.07.2016, Mounted=Yes, Part Description="Miniature Surface Mount Power Inductor (8200 Series)", Pin Count=2, Sense=No, SMD=Yes, Socket=No, Status=None
LD21 LD22: library part LED_KINGBRIGHT_KPH-1608CGCK, "LED Green 1C 2A", Manufacturer=KINGBRIGHT, Manufacturer Part Number=KPH-1608CGCK, Author="CERN DEM JLC", Bonding=No, Color=Green, ComponentHeight=0.65mm, Component Type=Standard, CreateDate=03.07.2017, HelpURL=\\cern.ch\dfs\Applications\Altium\Datasheets\LED_KINGBRIGHT_KPH-1608CGCK.pdf, LatestRevisionDate=03.07.2017, Mounted=Yes, PackageDescription="SMT Green LED, Case 0603, Body L 1.6 x W 0.8mm H 0.65mm", Part Description="SMD Green LED, Case 1.6mmX0.8mm(0603), 0.65mm Thickness", Part Number=LED_KINGBRIGHT_KPH-1608CGCK, Pin Count=2, PressFit=No, Sense=No, SMD=Yes, Socket=No
Q7: "Quartz Crystal 20MHz, 30ppm, 20pF", Manufacturer="SR PASSIVES", Manufacturer Part Number=20M-49SMD-SR, Part Number="SR PASSIVES 20M-49SMD-SR", Author=GK, Bonding=No, ComponentHeight=4.3mm, Component Type=Standard, CreateDate=19.04.2012, HelpURL=\\cern.ch\dfs\Applications\Altium\Datasheets\XTAL_IQD_LFXTAL003166.pdf, LatestRevisionDate=07.11.2016, Mounted=Yes, PackageDescription="HC49/4H SMX Case, SMD Cristal, Body 11.6x4.9mm", Part Description="Tolerance:± 30ppm, Stability:± 50ppm, -10°C to +60°C, 20pF, Surface Mount Quartz Crystal, HC49/4HSMX Series", Pin Count=2, PressFit=No, Sense=No, SMD=Yes, Socket=No
R3 R149 R151 R283 R285 R291 R294 R297 R298 R299 R346 R347: library part R0402_10K_1%_0.0625W_100PPM, "Resistor - 1%", Case=0402, Manufacturer=GENERIC, Manufacturer1 ComponentHeight=0.4mm, Manufacturer1 Example="YAGEO PHYCOMP", Manufacturer1 Part Number=232270671003L, Power=0.0625W, Tolerance=±1%, Author="CERN DEM JLC", Component Type=Standard, HelpURL=\\cern.ch\dfs\Applications\Altium\Datasheets\R0402_Phycomp_RC0402.pdf, Manufacturer Part Number=R0402_10K_1%_0.0625W_100PPM, Mounted=Yes, Part Description="General Purpose Thick Film Chip Resistor", Part Number=R0402_10K_1%_0.0625W_100PPM, Pin Count=2, SMD=Yes, Socket=No, TC=±100ppm/°C
  R3 R149 R151 R283 R285 R291 R346 R347: CreateDate=03.12.2007, LatestRevisionDate=17.10.2012, PressFit=No, Sense=No, Status="Not Recommended"
  R294 R297 R298 R299: CreateDate=2007-12-03, LatestRevisionDate=2012-10-17, Status="Not recommended", Table="Resistors SMD"
R284: library part R0402_4K7_1%_0.0625W_100PPM, "Resistor - 1%", Case=0402, Manufacturer=GENERIC, Manufacturer1 ComponentHeight=0.4mm, Manufacturer1 Example="YAGEO PHYCOMP", Manufacturer1 Part Number=232270674702L, Power=0.0625W, Tolerance=±1%, Author="CERN DEM JLC", Component Type=Standard, CreateDate=03.12.2007, HelpURL=\\cern.ch\dfs\Applications\Altium\Datasheets\R0402_Phycomp_RC0402.pdf, LatestRevisionDate=17.10.2012, Manufacturer Part Number=R0402_4K7_1%_0.0625W_100PPM, Mounted=Yes, Part Description="General Purpose Thick Film Chip Resistor", Part Number=R0402_4K7_1%_0.0625W_100PPM, Pin Count=2, PressFit=No, Sense=No, SMD=Yes, Socket=No, Status="Not Recommended", TC=±100ppm/°C
R286 R287: library part R0402_1K_1%_0.0625W_100PPM, "Resistor - 1%", Case=0402, Manufacturer=GENERIC, Manufacturer1 ComponentHeight=0.4mm, Manufacturer1 Example="YAGEO PHYCOMP", Manufacturer1 Part Number=232270671002L, Power=0.0625W, Tolerance=±1%, Author="CERN DEM JLC", Component Type=Standard, CreateDate=03.12.2007, HelpURL=\\cern.ch\dfs\Applications\Altium\Datasheets\R0402_Phycomp_RC0402.pdf, LatestRevisionDate=17.10.2012, Manufacturer Part Number=R0402_1K_1%_0.0625W_100PPM, Mounted=Yes, Part Description="General Purpose Thick Film Chip Resistor", Part Number=R0402_1K_1%_0.0625W_100PPM, Pin Count=2, PressFit=No, Sense=No, SMD=Yes, Socket=No, Status="Not Recommended", TC=±100ppm/°C
R288 R289: library part R0402_68K_1%_0.0625W_100PPM, "Resistor - 1%", Case=0402, Manufacturer=GENERIC, Manufacturer1 ComponentHeight=0.4mm, Manufacturer1 Example="YAGEO PHYCOMP", Manufacturer1 Part Number=232270676803L, Power=0.0625W, Tolerance=±1%, Author="CERN DEM JLC", Component Type=Standard, CreateDate=03.12.2007, HelpURL=\\cern.ch\dfs\Applications\Altium\Datasheets\R0402_Phycomp_RC0402.pdf, LatestRevisionDate=17.10.2012, Manufacturer Part Number=R0402_68K_1%_0.0625W_100PPM, Mounted=Yes, Part Description="General Purpose Thick Film Chip Resistor", Part Number=R0402_68K_1%_0.0625W_100PPM, Pin Count=2, PressFit=No, Sense=No, SMD=Yes, Socket=No, Status="Not Recommended", TC=±100ppm/°C
R290 R385 R386: library part R0402_13K_1%_0.0625W_100PPM, "Resistor - 1%", Case=0402, Manufacturer=GENERIC, Manufacturer1 ComponentHeight=0.4mm, Manufacturer1 Example="YAGEO PHYCOMP", Manufacturer1 Part Number=232270671303L, Power=0.0625W, Tolerance=±1%, Author="CERN DEM JLC", Component Type=Standard, CreateDate=03.12.2007, HelpURL=\\cern.ch\dfs\Applications\Altium\Datasheets\R0402_Phycomp_RC0402.pdf, LatestRevisionDate=17.10.2012, Manufacturer Part Number=R0402_13K_1%_0.0625W_100PPM, Mounted=Yes, Part Description="General Purpose Thick Film Chip Resistor", Part Number=R0402_13K_1%_0.0625W_100PPM, Pin Count=2, PressFit=No, Sense=No, SMD=Yes, Socket=No, Status="Not Recommended", TC=±100ppm/°C
R292 R293 R295 R296: library part R1206_1M_1%_0.25W_100PPM, "Resistor - 1%", Case=1206, Manufacturer=GENERIC, Manufacturer1 ComponentHeight=0.65mm, Manufacturer1 Example="NIC COMPONENT", Manufacturer1 Part Number=NRC12F1004TRF, Power=0.25W, Tolerance=±1%, Author="CERN DEM JLC", Component Type=Standard, CreateDate=03.12.2007, HelpURL=\\cern.ch\dfs\Applications\Altium\Datasheets\R1206_NIC_NRC.pdf, LatestRevisionDate=13.03.2008, Manufacturer Part Number=R1206_1M_1%_0.25W_100PPM, Mounted=Yes, Part Description="General Purpose Thick Film Chip Resistor", Part Number=R1206_1M_1%_0.25W_100PPM, Pin Count=2, PressFit=No, Sense=No, SMD=Yes, Socket=No, Status=Preferred, TC=±100ppm/°C
RL4: library part REL_TYCO_PE014F05, "1 form C (CO) General Purpose Low Power PCB Relay, PE Series", Manufacturer="TYCO SCHRACK", Manufacturer Part Number="PE014F05 or 1-1415390-1", Author="CERN DEM JLC", ComponentHeight=10mm, Component Type=Standard, CreateDate=20.03.2018, HelpURL=\\cern.ch\dfs\Applications\Altium\Datasheets\REL_TYCO_PE014F05.pdf, LatestRevisionDate=20.03.2018, Mounted=Yes, PackageDescription="1 form C (CO) General Purpose Low Power PCB Relay, PE Series, Body 20mm x 10mm", Part Description="5A/250VAC 1 form C (CO) General Purpose Low Power PCB Relay, PE Series", Part Number=REL_TYCO_PE014F05, Pin Count=5, PressFit=No, Sense=No, SMD=No, Socket=No, Status=None
TP11 TP12 TP13 TP14: library part SMD_PAD_1.27X1.27MM, Author="CERN DEM JLC", ComponentHeight=0mm, Component Type="Standard (No BOM)", CreateDate=12.01.2008, Family="Test Point", HelpURL=Undefined, LatestRevisionDate=12.01.2008, Mounted=No, PackageDescription="1.27mm x 1.27mm PCB Copper Area (SMD Test Point)", Part Description="1.27mm x 1.27mm PCB Copper Area (SMD Test Point)", Part Number=SMD_PAD_1.27X1.27MM, Pin Count=1, Sense=No, SMD=Yes, Socket=No, Status=None

## Via types
v1: diameter 0.5, hole 0.2, Top to Bot, tented both sides, 66 vias
v2: diameter 0.6, hole 0.4, Top to Bot, tented both sides, 10 vias

## Nets (pads, with @x,y where several pads share a name; then routed paths per layer and width w, separated by ;. In a path a pad name is that pad's centre, name@x,y a point inside that pad or via, vN(x,y) a via of type N, cw(c..) or ccw(c..) an arc to the next point about the centre after c; other vN are vias at no path point)
AC_MEAS: C209.1 IC71.25 R294.2 R298.2 | length 32
  Top w0.152: R294.2 R298.2 C209.1@14.996,33.433 ; v1(22.992,31.457) 23.06,31.457 23.115,31.511 18.23,31.511 17.138,30.419 16.418,30.419 16.083,30.754 16.083,33.302 15.952,33.433 C209.1@15.036,33.433 ; v1(24.324,31.487) 25.139,31.487 25.938,30.687 26.335,30.687 28.147,32.5 28.147,32.736 28.428,33.016 28.909,33.016 30.556,31.369 30.556,31.042 30.942,30.656 30.942,30.591 32.114,29.419 32.114,28.287 32.462,27.939 32.462,25.035 32.288,24.861 32.174,24.747 31.758,24.747 31.442,24.431 IC71.25 ; C209.1@14.996,33.433 C209.1 C209.1@15.036,33.433 ; C209.1@14.996,33.433 C209.1@15.036,33.433
  Bot w0.152: v1(22.992,31.457) 23.022,31.487 v1(24.324,31.487)
CAN_CSn: IC69.18 IC71.19 | length 3.1
  Top w0.152: IC69.18 27.247,21.11 27.247,21.924 27.923,22.6 27.923,23.723 IC71.19
CAN_INT: IC69.13 IC71.1 | length 11.1
  Top w0.152: IC69.13@30.358,20.971 30.358,21.764 31.298,22.704 31.298,23.65 32.09,24.442 32.3,24.442 32.767,24.909 32.767,28.311 v1(32.593,28.485) ; IC71.1 30.431,28.502 30.499,28.434 30.549,28.483 v1(31.636,28.483)
  Bot w0.152: v1(31.636,28.483) 32.591,28.483 v1(32.593,28.485) v1@32.651,28.485
CAN_MISO: IC69.17 IC71.23 | length 4.6
  Top w0.152: IC69.17 27.906,21.119 27.906,21.742 28.201,22.037 29.718,22.037 30.023,22.343 30.023,23.639 IC71.23
CAN_MOSI: IC69.16 IC71.22 | length 6.5
  Top w0.152: IC69.16 28.407,19.818 29.413,19.818 v1(29.418,19.823) ; IC71.22 29.431,22.401 29.545,22.514 v1(29.545,22.541)
  Bot w0.152: v1(29.418,19.823) 29.418,20.738 29.392,20.763 29.392,22.313 29.545,22.465 v1(29.545,22.541)
CAN_SCK: IC69.14 IC71.24 | length 3.1
  Top w0.152: IC69.14 29.707,21.605 29.768,21.605 29.903,21.741 29.903,21.79 30.431,22.318 IC71.24
CANH: D71.1 IC68.7 J1.2 | length 11.6
  Top w0.152: J1.2 25.19,6.875 29.101,10.786 29.101,11.201 v1@29.355,11.455 ; v1(29.465,11.345) 29.465,11.387 29.875,11.797 IC68.7 IC68.7@30.954,11.573
  Bot w0.152: v1(29.465,11.345) 29.465,12.034 29.544,12.112 D71.1
CANL: D71.2 IC68.6 J1.3 | length 8.9
  Top w0.152: J1.3 27.73,8.687 v1(29.951,10.908) 30.045,10.908 30.202,10.751 30.954,10.751 IC68.6
  Bot w0.152: D71.2 29.951,10.263 v1(29.951,10.908)
GND: C1.1 C198.1 C199.1 C200.1 C201.1 C202.2 C203.1 C205.1 C206.1 C207.1 C209.2 C210.2 C211.2 D63.2 D71.3 D74.2 IC44.1 IC44.10 IC44.19 IC45.1 IC45.2 IC45.3 IC45.4 IC45.7 IC46.2 IC48.4 IC68.2 IC69.10 IC71.5 IC71.21 IC71.33 J1.4 J85.6 LD21.1 LD22.1 R149.1 R151.1 R284.1 R290.1 R297.2 R298.1 R347.1 R386.1 TP12.1 | length 63.1
  Top w0.152: v1(2.164,21.347) 2.164,21.441 2.086,21.519 2.086,24.07 2.216,24.199 2.216,24.516 C207.1 2.684,24.984 3.323,24.984 LD22.1 ; v1(3.434,20.611) 3.434,19.996 5.155,18.275 IC48.4 v1(5.155,16.16) 4.38,16.16 R297.2 ; D74.2 10.447,34.149 v1(11.155,34.149) ; R298.1 15.016,34.373 15.029,34.386 v1(15.753,34.386) ; C210.2 15.48,32.785 v1(15.549,32.785) ; C202.2 16.711,32.269 v1(17.378,32.269) ; LD21.1 17.825,27.09 IC44.1 17.83,28.855 17.83,30.004 v1(17.835,30.009) ; v1(18.445,33.412) 18.46,33.427 18.46,34.635 IC44.19 ; IC46.2@21.25,16.3 21.264,16.286 v1(21.264,15.251) ; v1(21.7,17.2) 22.45,17.95 C206.1 ; J85.6 21.931,25.996 v1(22.611,25.996) ; v1@22.361,10.841 21.561,10.841 21.653,10.846 v1(22.454,10.846) 22.458,10.85 R386.1@22.458,11.668 ; R290.1 24.234,9.284 C199.1 24.484,9.066 24.484,8.75 24.728,8.506 v1(24.728,8.412) ; v1(23.525,20.916) 23.525,20.275 C198.1 ; v1(23.652,30.06) 23.663,30.048 23.663,28.861 IC44.10 ; C211.2 24.452,22.789 24.452,22.746 24.784,22.414 25.303,22.414 25.405,22.516 25.506,22.414 25.894,22.414 C203.1 ; v1(24.566,27.494) 24.566,27.57 24.82,27.824 24.82,28.066 R149.1 ; v1(25.532,34.276) 25.532,34.644 25.659,34.771 R151.1@25.646,34.784 ; IC68.2 25.803,11.822 v1(27.005,11.822) ; IC71.5 28.431,26.431 IC71.33 28.931,25.931 28.931,23.778 28.884,23.731 28.908,23.708 28.908,22.539 v1(28.884,22.516) ; IC69.10 31.686,15.099 v1(32.161,15.099) ; C1.1 34.498,27.309 v1(34.498,27.977) ; C200.1 34.066,8.984 v1(34.066,8.292) ; C201.1@36.472,25.488 36.472,25.335 36.812,24.995 37.047,24.995 v1(37.114,24.929)
  Bot w0.152: v1(2.164,21.347) 2.203,21.308 2.736,21.308 v1(3.434,20.611) ; 20.534,31.902 20.534,31.872 ; IC45.2 20.534,31.222 20.534,31.872 ; IC45.3 20.534,31.872 ; IC45.4 20.598,32.522 20.503,32.427 20.503,30.602 20.533,30.572 IC45.1 23.14,30.572 v1(23.652,30.06) ; v1(22.454,10.846) 22.454,12.041 22.504,12.092 22.458,12.138 D63.2 ; v1(26.137,31.166) 26.193,31.222 IC45.7 ; v1(27.005,11.822) 27.005,11.728 27.151,11.582 27.151,11.386 27.375,11.162 D71.3 ; R284.1 31.27,14.22 32.149,15.099 v1(32.161,15.099) ; TP12.1 37.114,23.354 v1(37.114,24.929)
  other v1: 25.354,22.414 27.259,24.802 28.662,24.831 30.002,24.853 27.334,26.12 28.667,26.12 29.951,26.181 28.692,27.484 27.259,27.545 30.104,27.545
LED: IC71.13 R3.1 | length 10.3
  Top w0.152: R3.1 17.474,23.011 18.582,24.118 21.013,24.118 21.163,24.268 v1(21.061,24.268) ; v1@22.941,24.37 v1(22.941,24.522) 24.35,25.931 IC71.13
  Bot w0.152: v1(21.061,24.268) 21.302,24.51 22.928,24.51 v1(22.941,24.522)
NetC200_2: C200.2 IC69.9 Q7.1 | length 9.3
  Top w0.152: IC69.9 31.156,14.921 31.156,14.298 31.337,14.116 34.076,14.116 34.95,13.243 C200.2
NetC201_2: C201.2 IC69.8 Q7.2 | length 14.2
  Top w0.152: IC69.8 30.506,15.219 30.506,15.842 31.267,16.603 33.967,16.603 34.426,17.063 34.426,17.071 34.726,17.371 34.726,17.763 34.722,17.767 34.722,21.722 Q7.2 35.572,22.572 C201.2@35.572,25.488
NetC204_1: C204.1 IC46.4 | length 2.6
  Top w0.152: C204.1 18.601,14.949 18.949,14.949 19.156,14.742 19.156,14.729 19.436,14.449 19.889,14.449 20.391,13.947 IC46.4@20.391,13.697
NetC204_2: C204.2 IC46.3 L12.1 | length 4.8
  Top w0.152: L12.1 18.355,16.095 C204.2 19.284,15.95 19.634,16.3 IC46.3@20.3,16.3
NetC205_2: C205.2 D72.1 IC46.1 R385.2 | length 9.7
  Top w0.152: D72.1 19.308,13.39 ; v1@19.634,13.843 19.308,13.517 19.308,13.39 ; v1(19.634,14.935) 19.685,14.986 20.853,14.986 21.066,14.773 21.834,14.773 22.291,15.229 IC46.1 ; C205.2 19.901,11.735 R385.2 19.926,12.725 19.456,12.725 19.308,12.874 19.308,13.39 ; IC46.1@22.092,16.192 IC46.1@22.2,16.3
  Bot w0.152: v1(19.634,13.97) v1(19.634,14.935)
NetC208_1: C208.1 IC48.1 R299.1 | length 10.7
  Top w0.152: R299.1 1.38,17.765 IC48.1 1.569,18.024 1.569,19.854 3.113,21.398 3.481,21.398 4.414,22.33 4.414,23.857 5.123,24.566 5.266,24.566 C208.1
NetC208_2: C208.2 D73.2 D74.1 | length 12.8
  Top w0.152: C208.2 5.734,25.934 5.734,29.171 8.085,31.522 10.29,31.522 10.444,31.676 D74.1 10.444,32.056 11.14,32.752 11.369,32.752 12.294,33.677 12.294,33.796 12.346,33.796 12.5,33.95 D73.2
NetC210_1: C210.1 D73.1 R294.1 | length 2.8
  Top w0.152: D73.1 13.162,31.86 13.601,31.421 C210.1 C210.1@14.95,31.487
NetC211_1: C211.1 IC71.20 | length 4.3
  Top w0.152: C211.1 25.093,23.252 v1(25.684,23.252) ; v1(28.402,22.973) 28.416,22.988 28.416,23.717 IC71.20
  Bot w0.152: v1(25.684,23.252) 28.028,23.252 28.308,22.973 v1(28.402,22.973)
NetIC44_3: IC44.3 IC44.5 IC44.7 IC44.9 RL4.A1 | length 21.6
  Top w0.152: RL4.A1 8.919,28.161 15.819,28.161 16.728,29.071 16.728,29.578 17.637,30.487 18.601,30.487 19.125,29.964 ; IC44.3 19.125,29.964 ; IC44.5 20.477,28.902 20.477,29.964 ; IC44.7 21.704,28.871 21.704,29.829 21.569,29.964 ; IC44.9 22.876,28.999 22.876,29.647 22.559,29.964 21.569,29.964 ; 19.125,29.964 20.477,29.964 ; 20.477,29.964 21.569,29.964
NetIC44_12: IC44.12 IC44.14 IC44.16 IC44.18 RL4.A2 | length 21.2
  Top w0.152: v1(16.616,30.898) 16.683,30.898 17.801,32.015 18.194,32.015 18.393,31.816 22.02,31.816 22.172,31.969 22.519,31.969 22.544,31.944 23.007,31.944 23.415,32.351 23.415,32.938 23.025,33.328 ; IC44.18 19.125,33.3 19.542,32.883 20.405,32.883 ; IC44.16 20.405,34.63 20.405,32.883 ; IC44.14 21.891,34.484 21.891,33.053 ; IC44.12 23.025,33.328 ; 20.405,32.883 20.506,32.781 21.62,32.781 21.891,33.053 ; 21.891,33.053 22.621,33.053 22.667,33.099 22.694,33.099 22.923,33.328 23.025,33.328
  Bot w0.152: RL4.A2 15.31,29.498 16.616,30.804 v1(16.616,30.898)
NetIC46_5: IC46.5 R385.1 R386.2 | length 2.6
  Top w0.152: IC46.5 21.341,12.251 R385.1 22.314,12.243 R386.2@22.454,12.383
NetIC46_6: IC46.6 R289.1 | length 1.4
  Top w0.152: IC46.6@22.291,13.697 22.348,13.755 23.387,13.755 R289.1
NetIC48_2: IC48.2 R293.2 R299.2 | length 12.2
  Top w0.152: R299.2 2.534,16.314 2.534,17.719 IC48.2 2.839,18.024 2.839,20.693 3.239,21.093 4.932,21.093 v1(5.974,22.135)
  Bot w0.152: v1(5.974,22.135) 7.301,23.462 7.301,24.501 R293.2
NetIC48_3: IC48.3 R296.2 R297.1 | length 4.6
  Top w0.152: R296.2 1.55,14.825 2.049,15.324 2.624,15.324 3.38,16.08 R297.1 3.594,16.314 3.594,17.034 3.885,17.325 IC48.3
NetIC68_1: IC68.1 IC69.1 | length 2
  Top w0.152: IC68.1 25.807,13.096 IC69.1
NetIC68_4: IC68.4 IC69.2 | length 7.5
  Top w0.152: IC68.4 26.253,9.257 27.788,10.792 27.788,12.455 26.457,13.786 IC69.2
NetIC68_8: IC68.8 R284.2 | length 2.2
  Top w0.152: v1(30.408,13.702) 30.408,13.608 30.479,13.537 30.479,13.291 30.703,13.067 IC68.8
  Bot w0.152: v1(30.408,13.702) 30.502,13.702 30.711,13.494 31.036,13.494 R284.2
NetIC69_19: IC69.19 R283.2 | length 3.1
  Top w0.152: R283.2 24.47,19.27 25.145,19.945 25.217,19.945 25.269,19.997 26.107,19.997 26.308,20.198 26.308,20.821 IC69.19
NetJ1_6: J1.6 R346.1 R347.2 | length 25.5
  Top w0.152: R346.1 34.574,25.475 R347.2 34.788,26.15 36.6,26.15 37.593,25.158 37.593,7.243 J1.6
NetJ51_2: J51.2 RL4.14 | length 5.9
  Bot w1.524: RL4.14 7.69,6.692 8.325,6.057 J51.2
NetJ51_4: J51.4 RL4.12 | length 6.9
  Bot w1.524: RL4.12 15.401,11.519 15.401,8.879 J51.4
NetLD21_2: LD21.2 R3.2 | length 1.2
  Top w0.152: R3.2 17.505,24.002 LD21.2
NetLD22_2: LD22.2 R291.2 | length 1.4
  Top w0.152: LD22.2 4.394,27.704 4.394,27.725 4.607,27.939 R291.2
NetR288_1: R288.1 R289.2 R290.2 | length 3.9
  Top w0.152: R290.2@23.266,10.198 23.584,10.198 23.673,10.287 23.673,11.72 23.98,11.72 24.23,11.97 24.016,12.184 24.016,12.634 23.621,13.029 R289.2
NetR292_2: R292.2 R293.1 | length 3.5
  Bot w0.152: R293.1 10.7,24.675 11.676,23.699 11.676,22.949 12.175,22.45 R292.2
NetR295_2: R295.2 R296.1 | length 3.1
  Top w0.152: R295.2 R296.1
NTC_ANA_IN: C1.2 IC71.26 R346.2 | length 5
  Top w0.152: IC71.26 31.446,24.931 31.682,25.167 31.917,25.167 v1(31.983,25.234) ; v1(33.122,24.317) 33.122,24.383 33.408,24.669 33.408,25.248 R346.2 33.634,25.475 C1.2
  Bot w0.152: v1(31.983,25.234) 31.983,24.938 32.479,24.442 32.486,24.442 32.611,24.317 v1(33.122,24.317)
P5V0: C198.2 C199.2 C202.1 C203.2 C206.2 C207.2 IC44.20 IC45.8 IC48.8 IC68.3 IC69.20 IC71.4 IC71.18 J1.5 J85.2 L12.2 R283.1 R285.1 R286.2 R287.2 R288.2 R291.1 TP11.1 | length 128
  Top w0.152: 17.117,34.65 IC44.20 ; J85.2 19.385,26.81 19.993,27.418 22.399,27.418 22.644,27.174 ; R283.1 23.53,19.33 23.59,19.33 24.216,19.956 24.216,20.016 C198.2 25.091,20.25 25.151,20.31 25.484,20.31 25.492,20.302 25.807,20.302 IC69.20 25.956,21.119 25.956,21.742 26.191,21.977 26.401,21.977 26.662,22.239 26.662,22.282 C203.2 27.13,22.75 27.13,23.12 27.431,23.421 IC71.18 ; R288.2 C199.2 24.353,10.303 25.554,10.303 IC68.3 26.002,10.751 26.61,10.751 27.483,11.624 27.483,12.021 26.995,12.509 24.937,12.509 24.541,12.906 ; 24.541,17.677 34.035,17.677 34.091,17.621 v2(34.091,17.677) ; 27.848,30.989 27.97,30.867 ; v2(27.97,29.831) v2@28.042,29.831 ; IC71.4 IC71.4@28.931,28.942 ; J1.5 36.229,8.419 36.229,15.857 35.234,16.852 v2(34.955,16.852)
  Top w0.254: v2@28.042,29.831 28.707,29.831 28.931,29.606 IC71.4@28.931,28.942
  Top w0.508: IC48.8 1.345,26.031 3.949,28.635 4.384,28.635 R291.1 5.28,29.531 5.28,29.966 8.549,33.235 11.169,33.235 11.812,33.877 11.812,34.676 12.431,35.296 15.926,35.296 16.692,34.53 ; 17.117,34.65 16.812,34.65 16.692,34.53 ; 18.813,20.506 17.005,22.315 16.976,22.315 16.692,22.598 16.692,25.682 16.974,25.963 19.385,25.963 J85.2 ; 19.046,20.483 19.547,19.982 19.547,18.797 19.595,18.75 L12.2 21.55,18.75 R285.1 22.05,19.25 R283.1 23.774,19.006 23.774,18.534 24.05,18.534 C206.2 24.233,17.817 24.541,17.817 24.541,17.677 24.541,12.906 ; 22.711,27.241 23.423,26.529 v2(25.201,26.529) ; v2@22.788,32.473 v2(22.886,32.57) 22.771,32.57 22.652,32.451 21.972,32.451 21.82,32.299 18.593,32.299 17.741,33.151 C202.1 16.692,34.53 ; v2(24.308,32.766) 25.137,33.596 25.966,33.596 26.165,33.794 26.165,33.854 26.194,33.883 26.194,34.36 ; 26.292,34.573 26.292,34.626 26.658,34.992 27.196,34.992 27.678,34.511 27.678,34.256 28.435,33.499 29.109,33.499 31.039,31.569 31.039,31.242 v2(31.471,30.81) ; v2(26.319,28.536) 26.319,29.221 v2(26.751,29.653) ; v2(27.97,29.831) 27.97,30.867 28.064,30.961 R286.2 29.645,30.302 v2(30.099,30.302)
  Bot w0.152: v2(34.091,17.677) 34.663,17.677 34.777,17.563 TP11.1@34.955,17.741 ; v2(34.955,16.852) TP11.1@34.955,17.741 ; TP11.1 TP11.1@34.955,17.741
  Bot w0.254: IC45.8 27.436,29.725 27.508,29.653
  Bot w0.508: v2(22.886,32.57) 23.814,32.57 24.01,32.766 v2(24.308,32.766) ; v2(25.201,26.529) 26.37,27.697 26.319,27.748 v2(26.319,28.536) ; v2(26.751,29.653) 27.508,29.653 27.792,29.653 v2(27.97,29.831) ; v2(30.099,30.302) 30.106,30.309 30.97,30.309 v2(31.471,30.81)
P12V0: D63.1 D72.2 J1.1 | length 11.8
  Top w0.152: D72.2 18.75,10.599 19.543,9.806 19.864,9.806 22.65,7.02 J1.1
  Bot w0.152: J1.1 22.65,8.03 D63.1
PROG_MISO: IC71.16 J85.1 | length 8.2
  Top w0.152: J85.1@19.385,22.217 19.385,22.91 20.214,23.739 21.24,23.739 21.324,23.823 22.526,23.823 22.61,23.739 23.305,23.739 23.56,23.994 24.846,23.994 25.283,24.431 IC71.16
PROG_MOSI: IC71.15 J85.4 | length 7.2
  Top w0.152: J85.4 20.655,25.17 21.021,24.803 21.041,24.823 21.188,24.823 21.556,24.455 22.325,24.455 22.736,24.044 23.179,24.044 24.066,24.931 IC71.15
PROG_SCK: IC71.17 J85.3 | length 7.4
  Top w0.152: J85.3@20.655,22.217 20.655,22.91 21.179,23.434 21.366,23.434 21.45,23.518 22.399,23.518 22.484,23.434 23.431,23.434 23.686,23.689 24.972,23.689 25.014,23.731 IC71.17
REL1: IC44.2 IC44.4 IC44.6 IC44.8 IC71.11 R149.2 | length 14.3
  Top w0.152: IC44.2 18.624,28.701 18.624,28.053 18.928,27.748 19.817,27.748 ; IC44.4 19.817,28.808 19.817,27.748 ; IC44.6 21.112,28.813 21.112,27.748 ; IC44.8 22.331,28.806 22.331,27.748 ; R149.2 24.648,29.158 24.129,28.639 24.129,28.006 23.871,27.748 ; IC71.11 25.921,26.931 25.659,27.193 24.942,27.193 24.765,27.016 24.368,27.016 23.871,27.512 23.871,27.748 ; 19.817,27.748 21.112,27.748 ; 21.112,27.748 22.331,27.748 ; 22.331,27.748 22.34,27.757 23.863,27.757 23.871,27.748
REL2: IC44.11 IC44.13 IC44.15 IC44.17 IC71.10 R151.2 | length 18.3
  Top w0.152: v1(19.74,33.362) 19.758,33.379 19.758,34.633 IC44.17 ; v1(21.036,33.26) 21.055,33.28 21.055,34.63 IC44.15 ; IC44.13 22.375,33.63 22.509,33.496 v1(22.509,33.59) ; R151.2@24.706,34.784 24.572,34.65 IC44.11 IC44.11 23.676,33.363 v1(23.677,33.362) 23.677,33.268 23.779,33.166 23.779,32.285 23.478,31.984 23.478,31.154 24.477,30.156 24.593,30.156 25.207,29.543 25.207,28.146 25.921,27.431 IC71.10
  Bot w0.152: v1@19.867,33.489 v1(19.74,33.362) 19.791,33.311 20.985,33.311 21.036,33.362 21.087,33.311 22.331,33.311 22.509,33.489 v1(22.509,33.59) 23.449,33.59 v1(23.677,33.362)
RESETn: IC71.29 J85.5 R285.2 | length 21.5
  Top w0.152: J85.5 J85.5@21.925,21.698 ; R285.2@22,20.22 21.925,20.295 J85.5@21.925,21.698 ; v1(25.125,20.789) 24.52,21.394 22.229,21.394 J85.5@21.925,21.698 ; v1(25.557,19.519) 28.03,19.519 28.229,19.319 31.28,19.319 32.288,20.328 v1(32.288,23.964) ; IC71.29 31.159,26.403 31.71,26.403 31.834,26.279 v1(31.928,26.279)
  Bot w0.152: v1(25.125,20.789) 25.125,19.998 25.557,19.566 v1(25.557,19.519) ; v1(31.928,26.279) 31.505,25.855 31.505,24.747 v1(32.288,23.964)
Rx: IC71.30 TP14.1 | length 2.7
  Top w0.152: IC71.30 31.159,26.96 31.949,26.96 v1(31.983,26.994)
  Bot w0.152: v1(31.983,26.994) 32.22,26.757 32.22,26.665 TP14.1@33.228,25.656
SCL1: IC45.6 IC71.6 R287.1 | length 12.4
  Top w0.152: v1(26.305,31.86) 26.305,32.889 ; R287.1 26.89,33.474 26.305,32.889 ; IC71.6 27.931,28.942 27.335,29.538 27.335,29.817 26.769,30.382 25.812,30.382 25.734,30.461 24.674,30.461 23.846,31.289 23.846,31.685 24.398,32.237 24.527,32.237 25.179,32.889 26.305,32.889
  Bot w0.152: v1(26.305,31.86) 26.317,31.872 IC45.6
SDA1: IC45.5 IC71.3 R286.1 | length 7.5
  Top w0.152: v1(28.626,32.537) 28.626,32.261 R286.1 29.2,31.687 29.807,31.687 30.251,31.243 30.251,30.916 30.628,30.54 30.628,30.083 30.318,29.774 30.263,29.774 29.431,28.942 IC71.3
  Bot w0.152: IC45.5@28.158,32.522 IC45.5 27.452,32.537 v1(28.626,32.537)
Tx: IC71.31 TP13.1 | length 2.8
  Top w0.152: IC71.31 31.442,27.431 31.717,27.707 31.917,27.707 31.856,27.646 v1(31.902,27.646)
  Bot w0.152: v1(31.902,27.646) 32.559,27.646 32.652,27.553 32.872,27.774 TP13.1@33.342,27.304
UMEAS1: J51.3 R292.1 RL4.11 | length 21.2
  Bot w0.152: RL4.11 8.741,20.281 11.384,20.281 12.114,19.55 R292.1
  Bot w1.524: RL4.11 12.095,14.825 12.095,7.185 J51.3
UMEAS2: J51.1 R295.1 | length 6.2
  Top w0.152: R295.1 2.049,10.917 2.049,7.231 J51.1
pads on no net: IC48.5 IC48.6 IC48.7 IC68.5 IC69.3 IC69.4 IC69.5 IC69.6 IC69.7 IC69.11 IC69.12 IC69.15 IC71.2 IC71.7 IC71.8 IC71.9 IC71.12 IC71.14 IC71.27 IC71.28 IC71.32

## Polygon pours and split planes (outlines as drawn)
GND on Bot "Signal Layer 1-No Net 1" (solid, remove dead copper, pour order 0): -0.046,15.556 5.567,15.556 5.745,15.734 5.745,21.119 7.167,22.541 7.167,25.945 8.006,26.783 13.644,26.783 16.286,24.141 16.286,22.135 17.861,20.56 17.861,13.804 18.699,12.965 18.699,10.629 21.188,8.139 21.188,0.076 21.112,0 38,0 38,25.338 27.588,35.75 10.25,35.75 0,25.5

## Keep-outs
KeepOutLayer:
  lines w0.2: 0,0 0,25.5 10.25,35.75 27.5,35.75 38,25.25 38,0 0,0
  lines w1: 0.792,12.94 2.57,12.94 3,12.51 3,10.516 ; 1.046,7.86 1.046,4.845 1.841,4.05 19.334,4.05 20.096,4.812 20.096,7.606 17.277,10.425 17.277,12.457 16.896,12.838 16.896,20.458 16.286,21.068 14,21.068 ; 5.897,10.933 5.897,12.711 7.142,13.956 10.456,13.956

## Silkscreen, mask and mechanical layers (free items; w line width, h text height)
TopOverlay:
  text "MEAS" at 0.792,0.494 h1.2
  text "COM" at 11.46,0.24 h1.2
  text "P" at 23.144,0.24 h1.2
  text "H" at 25.684,0.24 h1.2
  text "L" at 28.732,0.24 h1.2
  text "G" at 31.018,0.24 h1.2
  text "NTC" at 32.75,0.25 h1.2
BottomOverlay:
  text "Tx" at 31.14,27 h1.52
  text "Rx" at 30.937,24.714 h1.52
  text "HAPCAN" at 22.763,24.624 h1.52
  text "GND" at 34.955,22.465 h1.52
  text "SWITCH" at 22.75,22.3 h1.52
  text "RELAY" at 22,20.22 h1.52
  text "v1.0" at 20.299,17.791 h1.52
  text "Vcc" at 33.02,17.374 h1.52
Mechanical1:
  the board outline again, w0.1

## Text inside footprints (layer, text, board x,y; h text height)
J1: TopOverlay "6" at 34.969,6.778 h1; TopOverlay "4" at 29.889,6.778 h1; TopOverlay "1" at 22.523,6.778 h1; TopOverlay "2" at 24.809,6.778 h1; TopOverlay "3" at 27.349,6.778 h1; TopOverlay "5" at 32.429,6.778 h1
J51: TopOverlay "1" at 3.075,0.03 h1.2; Mechanical14 "1" at 1.375,7.63 h1.2